# EAGLE board OLED_Adapter (EAGLE 9.5.2)
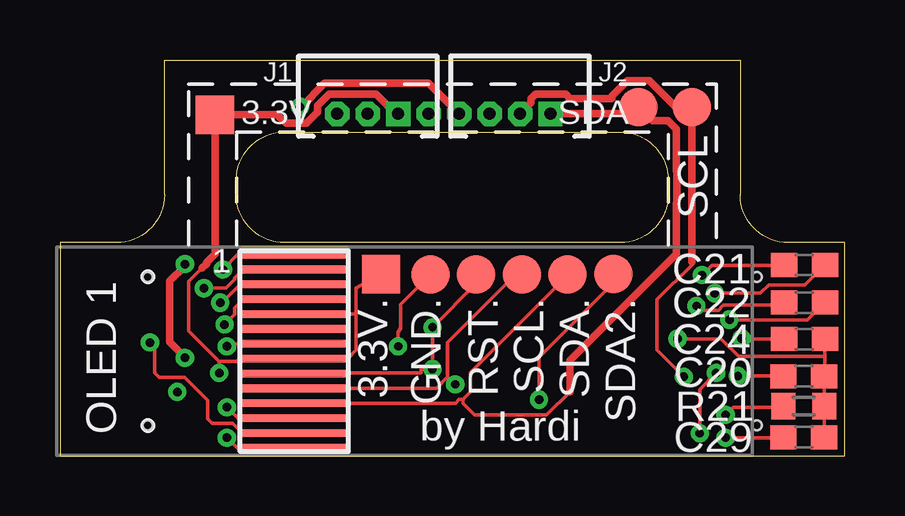
[diagram p0: board, top side]
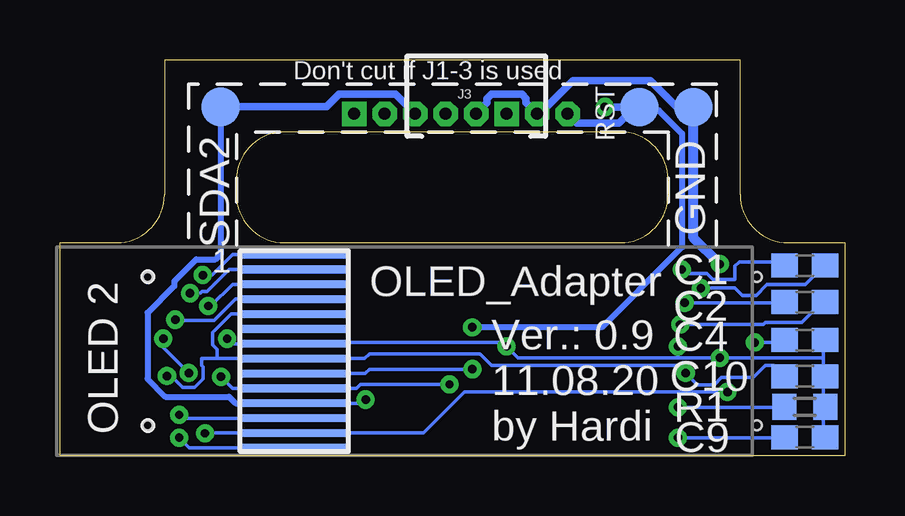
[diagram p1: board, bottom side, seen from below]

Size 32.72 x 16.5 mm. Coordinates in mm from the lower left corner, seen from the top.
Outline: 0,0 32.72,0 32.72,8.88 30.36,8.88 arc-90 28.36,10.88 28.36,16.5 4.36,16.5 4.36,10.88 arc-90 2.36,8.88 0,8.88 0,0
Outline: 23.36,8.88 9.36,8.88 arc-90 7.36,10.88 7.36,11.5 arc-90 9.36,13.5 23.36,13.5 arc-90 25.36,11.5 25.36,10.88 arc-90 23.36,8.88
Copper layers (1*16): Top 0.035mm / dielectric 1.5mm / Bottom 0.035mm
Design rules "default *": minimum track width 6mil, minimum drill 0.35mm, track to track 6mil, track to pad 6mil, pad to pad 6mil, via to via 6mil, smd to smd 6mil, copper to edge 8mil, drill to drill 6mil, minimum pad ring 10mil, minimum via ring 8mil, stop-mask expansion 4mil, vias tented up to drill 0mil, thermal gap 10mil

## Footprints (pad centres in the part's own frame; a part is rotated, then mirrored left to right if it is on the bottom)
TP16SQ = smd 1.6 x 1.6: TP 0,0
C0603 = smd 1.1 x 1: 1 -0.85,0; 2 0.85,0
TP16R = smd 1.6 x 1.6: TP 0,0
OLED_FLEX_W_DISP = smd 4.5 x 0.32: 1 0,0; 2 0,-0.62; 3 0,-1.24; 4 0,-1.86; 5 0,-2.48; 6 0,-3.1; 7 0,-3.72; 8 0,-4.34; 9 0,-4.96; 10 0,-5.58; 11 0,-6.2; 12 0,-6.82; 13 0,-7.44; 14 0,-8.06 | hole 0.4: -6.1,-0.93; -6.1,-7.13
MINI = drill 0.5 pad 1.016 square: 1 -1.27,0 | drill 0.5 pad 1.016 octagon: 2 0,0; 3 1.27,0
R0603 = smd 1 x 1.1: 1 -0.85,0; 2 0.85,0

## Placement (x,y rotation side)
3.3V  3.3V  [TP16SQ]  6.46,14.22 0 top
3.3V.  TPTP16SQ  [TP16SQ]  13.39,7.56 0 top
C1  470nF  [C0603]  1.67,7.92 180 bottom
C2  470nF  [C0603]  1.67,6.4 180 bottom
C4  2.2uF  [C0603]  1.67,4.83 180 bottom
C9  4.7uF  [C0603]  1.67,0.76 0 bottom
C10  4.7uF  [C0603]  1.67,3.3 0 bottom
C20  4.7uF  [C0603]  31.01,3.3 0 top
C21  470nF  [C0603]  31.04,7.95 180 top
C22  470nF  [C0603]  31.04,6.38 180 top
C24  2.2uF  [C0603]  31.04,4.86 180 top
C29  4.7uF  [C0603]  31.01,0.76 0 top
GND  GND  [TP16R]  6.3,14.53 0 bottom
GND.  TPTP16R  [TP16R]  15.45,7.56 0 top
IC1  OLED_FLEXW_DISP  [OLED_FLEX_W_DISP]  9.77,8.38 0 top
IC2  OLED_FLEXW_DISP  [OLED_FLEX_W_DISP]  22.95,8.38 0 bottom
J1  SV3  [MINI]  12.83,14.26 180 top
J2  SV3  [MINI]  19.18,14.26 180 top
J3  SV3  [MINI]  15.37,14.26 180 bottom
R1  560K  [R0603]  1.67,2.03 180 bottom
R21  560K  [R0603]  31.01,2.06 180 top
RST  RST  [TP16R]  8.56,14.53 0 bottom
RST.  TPTP16R  [TP16R]  17.35,7.56 0 top
SCL  SCL  [TP16R]  26.34,14.53 0 top
SCL.  TPTP16R  [TP16R]  19.26,7.56 0 top
SDA  SDA  [TP16R]  24.12,14.53 0 top
SDA2  SDA2  [TP16R]  26.02,14.54 0 bottom
SDA2.  TPTP16R  [TP16R]  23.08,7.57 0 top
SDA.  TPTP16R  [TP16R]  21.16,7.56 0 top

## Library data of the parts
3.3V 3.3V. GND GND. RST RST. SCL SCL. SDA SDA2 SDA2. SDA. = testpad
C1 C2 C4 C9 C10 C20-C22 C24 C29 = resistor
IC1 IC2 = OLED_Flex
J1-J3 = SparkFun-Connectors
R1 R21 = rcl; SPICEPREFIX: R

## Nets
3.3V: 3.3V..TP 3.3V.TP C10.1 C20.1 IC1.5 IC1.8 IC2.5 IC2.8 J1.1 J3.1
GND: C4.1 C9.2 C10.2 C20.2 C24.1 C29.2 GND..TP GND.TP IC1.7 IC2.7 J1.2 J3.2 R1.1 R21.1
N$1: IC1.12 R1.2
N$2: C21.2 IC2.1
N$3: C1.2 IC1.1
N$4: C1.1 IC1.2
N$5: C2.2 IC1.3
N$6: C2.1 IC1.4
N$7: C9.1 IC1.14
N$8: C4.2 IC1.13
N$9: C21.1 IC2.2
N$10: C22.2 IC2.3
N$11: C22.1 IC2.4
N$12: IC2.12 R21.2
N$13: C29.1 IC2.14
N$14: C24.2 IC2.13
RES#: IC1.9 IC2.9 J1.3 J3.3 RST..TP RST.TP
SCL: IC1.10 IC2.10 J2.2 SCL..TP SCL.TP
SDA: IC1.11 J2.1 SDA..TP SDA.TP
SDA2: IC2.11 J2.3 SDA2..TP SDA2.TP

## Tracks (layer width: path | path; a pad name or v marks a point on that pad's centre or on a via)
3.3V  (via drill 0.35)
  Top 0.152: 3.3V..TP 12.35,6.98 12.35,5.86 | 6.64,3.92 5.37,5.19 5.37,7.26 5.93,7.82 | 6.64,3.92 7.37,3.92 7.49,4.04 IC1.8 9.81,4.08 12.04,4.08 12.35,4.4 12.35,5.86 | v28.26,3.32 30.13,3.32 C20.1 | v6.64,3.45 6.64,3.92 | IC1.5 12.31,5.9 12.35,5.86
  Top 0.305: 5.93,7.82 6.11,7.99 6.11,8.04 6.46,8.4 3.3V.TP 9.06,14.22 9.42,13.86 9.65,13.86 10.29,13.86 10.75,14.31 10.75,14.59 11.22,15.07 13.17,15.07 13.98,14.26 J3.1
  Bottom 0.152: C10.1 2.64,3.45 2.96,3.76 3.31,3.76 3.81,3.26 5.14,3.26 5.45,2.96 6.15,2.96 v6.64,3.45 6.64,3.76 14.73,3.76 15.21,4.24 19.81,4.24 20.01,4.04 IC2.8 26.16,4.04 | 26.16,4.04 26.81,4.04 26.81,3.76 26.75,3.7 26.75,3.19 27.1,2.84 27.6,2.84 28.08,3.32 v28.26,3.32 | 26.16,4.04 26.16,4.43 26.36,4.62 26.36,5.12 25.58,5.9 IC2.5
GND  (via drill 0.35)
  Top 0.152: v14.1,4.55 14.1,5.13 14.2,5.31 14.2,6.3 GND..TP | v6.96,4.56 6.99,4.56 7.09,4.66 IC1.7 | v25.75,4.87 27.56,4.87 28.3,4.13 31.86,4.13 31.89,4.1 | 5.21,4.1 v5.21,4.08 | C24.1 31.89,4.1 | 31.89,4.1 31.89,3.33 C20.2 R21.1 C29.2
  Top 0.305: v5.21,7.98 5.21,7.91 4.58,7.27 4.58,4.73 5.21,4.1
  Bottom 0.152: C9.2 0.89,0.91 0.89,2.02 R1.1 0.89,2.17 0.89,3.29 C10.2 0.89,3.45 0.89,4.08 | 0.89,4.08 0.89,4.71 C4.1 | 6.96,4.08 13.63,4.08 v14.1,4.55 14.26,4.71 22.83,4.71 IC2.7 25.75,4.66 v25.75,4.87 | 6.96,4.08 v5.21,4.08 0.89,4.08 | 6.96,4.08 v6.96,4.56
  Bottom 0.305: GND.TP 7,14.53 8.1,15.64 11.33,15.64 12.71,14.26 J1.2 13.29,14.71 13.29,14.89 13.47,15.07 14.73,15.07 14.91,14.89 14.91,14.71 J3.2
  Bottom 0.406: v5.21,7.98 6.31,9.08 GND.TP
N$1  (via drill 0.35)
  Top 0.152: IC1.12 7.43,1.56 7.33,1.66 7.32,1.66 v6.96,2.02
  Bottom 0.152: v6.96,2.02 2.64,2.02 R1.2
N$2  (via drill 0.35)
  Top 0.152: C21.2 30.17,7.93 27.17,7.93 v26.77,7.53
  Bottom 0.152: IC2.1 25.53,8.38 26.39,7.53 v26.77,7.53
N$3  (via drill 0.35)
  Top 0.152: IC1.1 7.64,8.38 7.62,8.4 7.43,8.4 v6.79,7.76
  Bottom 0.152: v6.79,7.76 6.62,7.59 5.75,7.59 5.5,7.34 4.58,7.34 4.58,7.91 4.4,8.08 2.68,8.08 C1.2
N$4  (via drill 0.35)
  Top 0.152: v6,6.98 6.92,6.98 7.29,7.35 7.29,7.4 7.65,7.76 IC1.2
  Bottom 0.152: C1.1 0.94,7.85 1.66,7.13 3.24,7.13 3.69,6.68 4.27,6.68 4.58,6.98 v6,6.98
N$5  (via drill 0.35)
  Top 0.152: IC1.3 7.51,7.14 6.74,6.37 v6.68,6.37
  Bottom 0.152: v6.68,6.37 2.54,6.37 C2.2
N$6  (via drill 0.35)
  Top 0.152: v6.86,5.46 7.29,5.89 7.29,6.16 7.65,6.52 IC1.4
  Bottom 0.152: C2.1 0.99,6.36 1.8,5.55 3.31,5.55 3.4,5.46 v6.86,5.46
N$7  (via drill 0.35)
  Top 0.152: IC1.14 7.38,0.32 v6.96,0.75
  Bottom 0.152: v6.96,0.75 2.64,0.75 C9.1
N$8  (via drill 0.35)
  Top 0.152: IC1.13 7.62,0.94 7.21,1.35 6.35,1.35 6.16,1.54 6.16,2.3 5.21,3.26 4.13,3.26 3.94,3.45 3.94,4.52 v3.75,4.71
  Bottom 0.152: v3.75,4.71 2.64,4.71 C4.2
N$9  (via drill 0.35)
  Top 0.152: C21.1 31.05,7.11 29.54,7.11 29.2,6.77 v27.3,6.77
  Bottom 0.152: IC2.2 25.67,7.76 26.59,6.84 26.79,6.84 26.86,6.77 v27.3,6.77
N$10  (via drill 0.35)
  Top 0.152: C22.2 30.08,6.27 27.66,6.27 27.44,6.05 26.72,6.05 v26.54,6.24
  Bottom 0.152: IC2.3 25.53,7.14 26.43,6.24 v26.54,6.24
N$11  (via drill 0.35)
  Top 0.152: C22.1 31.16,5.65 27.97,5.65 27.96,5.67 v27.91,5.67
  Bottom 0.152: v27.91,5.67 27.88,5.63 26.28,5.63 25.39,6.52 IC2.4
N$12  (via drill 0.35)
  Top 0.152: R21.2 30.13,2.02 28.07,2.02 v27.75,1.7
  Bottom 0.152: IC2.12 27.62,1.56 v27.75,1.7
N$13  (via drill 0.35)
  Top 0.152: v27.75,0.75 30.13,0.75 C29.1
  Bottom 0.152: IC2.14 27.33,0.32 v27.75,0.75
N$14  (via drill 0.35)
  Top 0.152: v28.42,4.87 30.13,4.87 C24.2 | v26.67,0.93 26.67,2.77 v27.35,3.45
  Bottom 0.152: v4.89,2.65 15.85,2.65 17.55,0.94 IC2.13 26.46,0.94 26.55,1.03 26.57,1.03 v26.67,0.93 | v27.35,3.45 28.42,4.51 v28.42,4.87
RES#  (via drill 0.35)
  Top 0.152: IC1.9 9.81,3.45 15.05,3.45 15.05,3.6 v15.53,3.6 v15.53,3.61 v15.53,5.35 17.35,7.17 RST..TP
  Top 0.305: v10.01,14.54 10.05,14.54 11.03,15.53 15.37,15.53 J3.3
  Bottom 0.152: v15.53,3.6 19.81,3.6 20,3.42 IC2.9
  Bottom 0.254: RST.TP 8.42,14.39 7.75,14.39 6.79,13.43 6.79,8.69 7.06,8.42 | 7.06,8.42 | v15.53,5.35 10.13,5.35 7.06,8.42
  Bottom 0.305: J1.3 11.16,13.86 9.42,13.86 8.74,14.53 RST.TP v10,14.53 v10.01,14.54
SCL  (via drill 0.35)
  Top 0.152: 16.16,3.29 16.16,4.73 18.99,7.56 SCL..TP | 16.16,3.29 15.69,2.81 9.81,2.81 IC1.10 | v16.48,2.97 16.16,3.29 | v26.01,3.29 24.89,4.4 24.89,6.51 26.34,7.96 26.34,8.06
  Top 0.305: 26.34,8.06 SCL.TP 25.68,14.53 24.57,15.64 23.66,15.64 23.01,14.99 23.01,14.91 22.99,14.89 21.26,14.89 21.08,15.07 19.82,15.07 19.64,14.89 19.64,14.71 J2.2
  Bottom 0.152: v26.01,3.29 25.53,2.81 22.99,2.81 IC2.10 20.36,2.8 20.2,2.97 v16.48,2.97
SDA
  Top 0.152: 16.8,2.33 17.12,2.65 17.12,3.46 21.16,7.51 SDA..TP | 16.8,2.33 16.64,2.33 16.49,2.18 IC1.11 | 21.25,2.66 20.29,1.7 17.27,1.7 16.8,2.17 16.8,2.33
  Top 0.305: 21.25,2.66 21.25,3.96 25.69,8.4 25.69,10.52 25.72,10.55 25.72,11.83 25.69,11.86 25.69,13.62 25.35,13.96 24.69,13.96 SDA.TP 23.84,14.26 J2.1
SDA2  (via drill 0.35)
  Top 0.152: v19.97,2.33 19.97,4.1 23.08,7.2 SDA2..TP
  Bottom 0.152: IC2.11 20.12,2.18 v19.97,2.33
  Bottom 0.254: SDA2.TP 26.02,8.39 26.23,8.18 27.04,8.18 27.96,7.27 27.96,7.07 29.07,5.95 29.07,3.2 28.33,2.45 25.68,2.45 25.41,2.18 IC2.11
  Bottom 0.305: SDA2.TP 21.61,14.54 21.08,15.07 18.72,15.07 J2.3

## Text on the board
tPlace: OLED 1 | by Hardi
bPlace: Don't cut if J1-3 is used | OLED_Adapter | OLED 2 | Ver.: 0.9 | 11.08.20 | by Hardi